# EAGLE board BARELYBONEARDUINO (EAGLE 7.2.0)
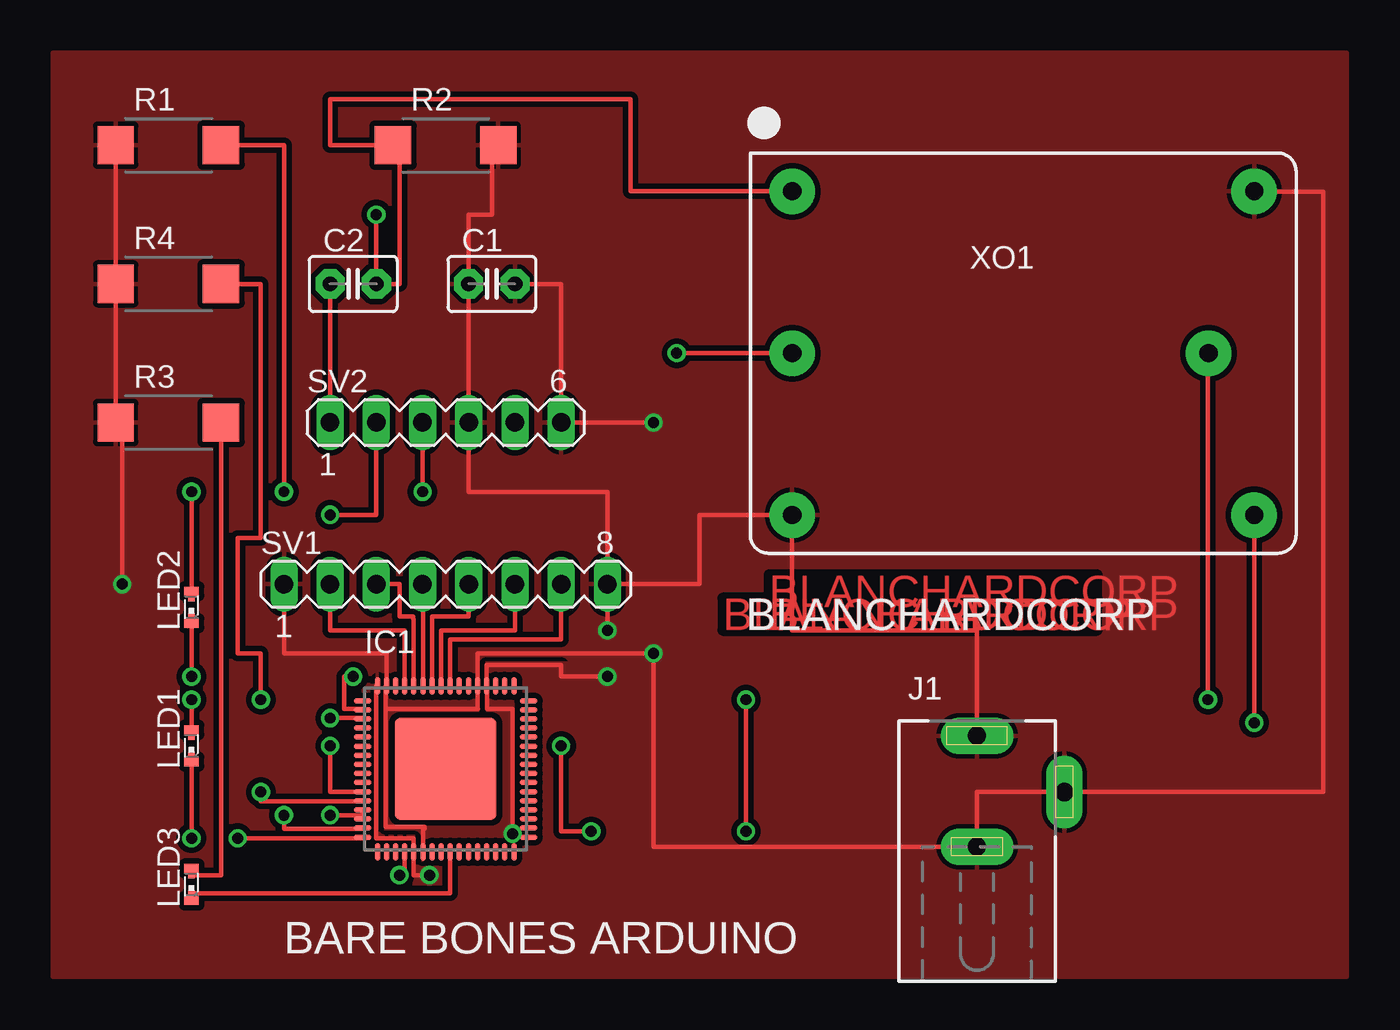
[diagram p0: board, top side]
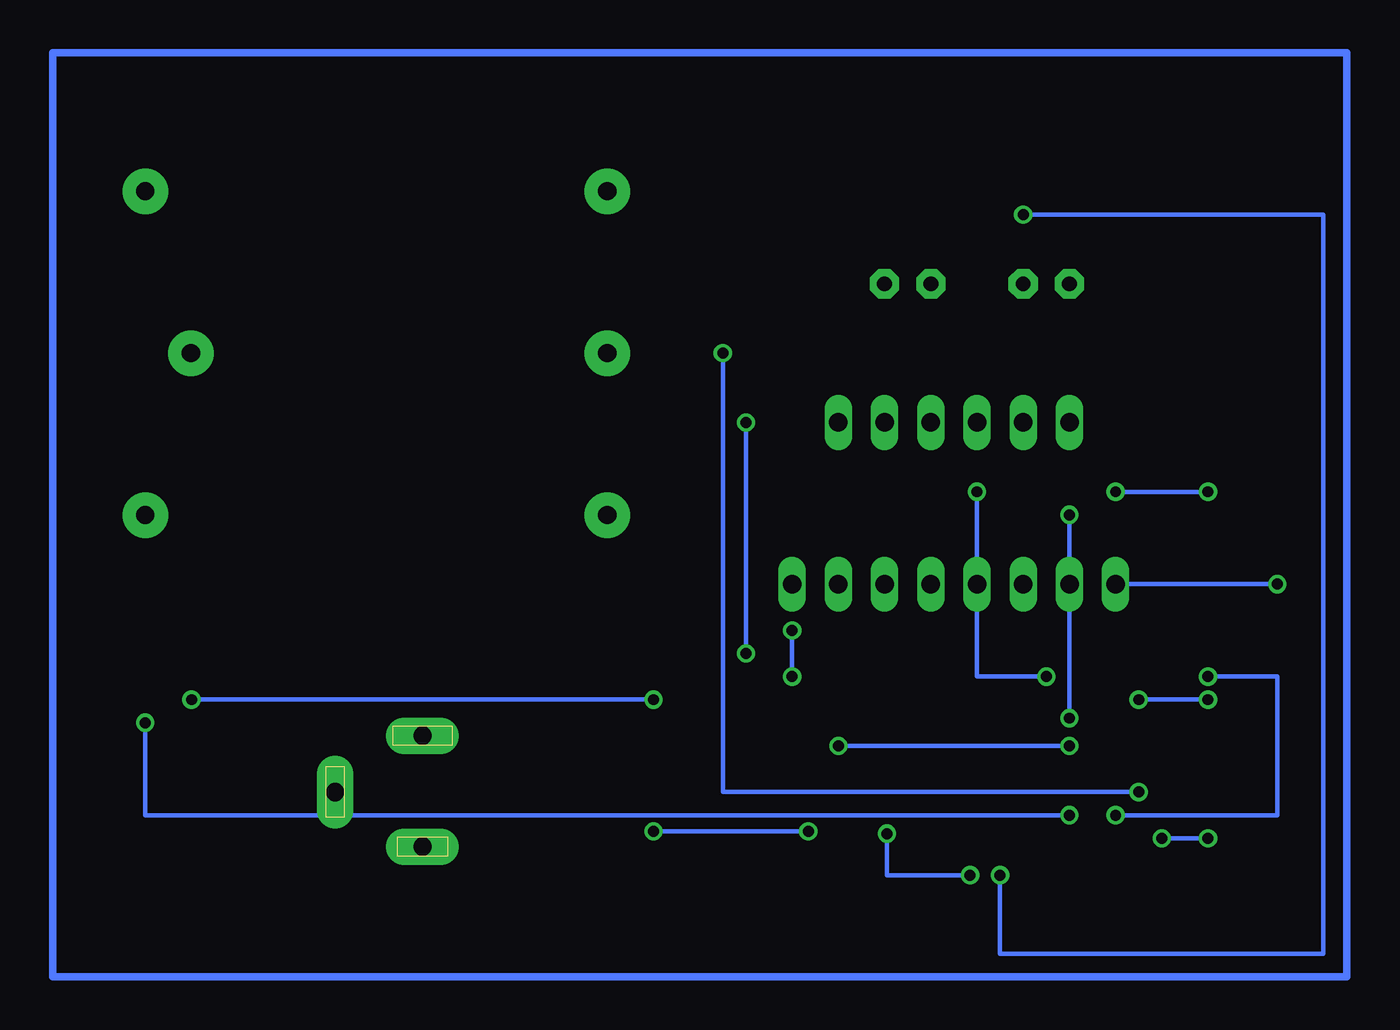
[diagram p1: board, bottom side, seen from below]

No outline drawn. Coordinates in mm, seen from the top.
Copper layers (1*16): Top 0.035mm / dielectric 1.5mm / Bottom 0.035mm
Design rules "default": minimum track width 10mil, minimum drill 24mil, track to track 8mil, track to pad 8mil, pad to pad 8mil, via to via 8mil, smd to smd 8mil, copper to edge 40mil, drill to drill 8mil, minimum pad ring 10mil, minimum via ring 8mil, stop-mask expansion 4mil, vias tented up to drill 0mil, thermal gap 10mil

## Footprints (pad centres in the part's own frame; a part is rotated, then mirrored left to right if it is on the bottom)
C2.5-3 = drill 0.813 pad 1.6 octagon: 1 -1.27,0; 2 1.27,0
64M1 = smd 0.95 x 0.3: 1 -4.56,3.75; 2 -4.56,3.25; 3 -4.56,2.75; 4 -4.56,2.25; 5 -4.56,1.75; 6 -4.56,1.25; 7 -4.56,0.75; 8 -4.56,0.25; 9 -4.56,-0.25; 10 -4.56,-0.75; 11 -4.56,-1.25; 12 -4.56,-1.75; 13 -4.56,-2.25; 14 -4.56,-2.75; 15 -4.56,-3.25; 16 -4.56,-3.75; 33 4.56,-3.75; 34 4.56,-3.25; 35 4.56,-2.75; 36 4.56,-2.25; 37 4.56,-1.75; 38 4.56,-1.25; 39 4.56,-0.75; 40 4.56,-0.25; 41 4.56,0.25; 42 4.56,0.75; 43 4.56,1.25; 44 4.56,1.75; 45 4.56,2.25; 46 4.56,2.75; 47 4.56,3.25; 48 4.56,3.75 | smd 0.3 x 0.95: 17 -3.75,-4.56; 18 -3.25,-4.56; 19 -2.75,-4.56; 20 -2.25,-4.56; 21 -1.75,-4.56; 22 -1.25,-4.56; 23 -0.75,-4.56; 24 -0.25,-4.56; 25 0.25,-4.56; 26 0.75,-4.56; 27 1.25,-4.56; 28 1.75,-4.56; 29 2.25,-4.56; 30 2.75,-4.56; 31 3.25,-4.56; 32 3.75,-4.56; 49 3.75,4.56; 50 3.25,4.56; 51 2.75,4.56; 52 2.25,4.56; 53 1.75,4.56; 54 1.25,4.56; 55 0.75,4.56; 56 0.25,4.56; 57 -0.25,4.56; 58 -0.75,4.56; 59 -1.25,4.56; 60 -1.75,4.56; 61 -2.25,4.56; 62 -2.75,4.56; 63 -3.25,4.56; 64 -3.75,4.56 | smd 5.6 x 5.6: EXP 0,0
DCJ0202 = drill 1 pad 2 long: 1 0,3.1; 2 4.8,0; 3 0,-3
SMARTLED-TTW = smd 0.8 x 0.5: A 0,-0.875; C 0,0.875 | smd 0.35 x 0.35: A@1 0,-0.5; C@1 0,0.5
R2512W = smd 2 x 2.1: 1 -2.896,0; 2 2.896,0
MA08-1 = drill 1.016 long: 1 -8.89,0; 2 -6.35,0; 3 -3.81,0; 4 -1.27,0; 5 1.27,0; 6 3.81,0; 7 6.35,0; 8 8.89,0
MA06-1 = drill 1.016 long: 1 -6.35,0; 2 -3.81,0; 3 -1.27,0; 4 1.27,0; 5 3.81,0; 6 6.35,0
CO-08-5 = drill 1 pad 2.5: 1 -12.7,8.9; 2 -12.7,0; 3 -12.7,-8.9; 4 12.7,-8.9; 5 12.7,8.9; 6 10.19,0

## Placement (x,y rotation side)
C1  [C2.5-3]  24.13,38.1 0 top
C2  [C2.5-3]  16.51,38.1 0 top
IC1  ATMEGA325P  [64M1]  21.59,11.43 0 top
J1  DCJ0202  [DCJ0202]  50.8,10.16 0 top
LED1  [SMARTLED-TTW]  7.62,12.7 0 top
LED2  [SMARTLED-TTW]  7.62,20.32 0 top
LED3  [SMARTLED-TTW]  7.62,5.08 0 top
R1  [R2512W]  6.35,45.72 0 top
R2  [R2512W]  21.59,45.72 0 top
R3  [R2512W]  6.35,30.48 0 top
R4  [R2512W]  6.35,38.1 0 top
SV1  [MA08-1]  21.59,21.59 0 top
SV2  [MA06-1]  21.59,30.48 0 top
XO1  OCXO-6-PIN-IQOV-70-8  [CO-08-5]  53.34,34.29 0 top

## Library data of the parts
C1 C2 = capacitor-wima
IC1 = atmel; MPN: ATMEGA325PV-10AU; OC_FARNELL: 1636939; OC_NEWARK: 03P2025
J1 = con-jack; OC_FARNELL: unknown; OC_NEWARK: unknown
LED1-LED3 = led
R1-R4 = resistor
SV1 SV2 = con-lstb; OC_FARNELL: unknown; OC_NEWARK: unknown
XO1 = IQD-Frequency-Products

## Nets
CTS: SV2.5
DTR: C2.1 SV2.1
GND: C1.2 IC1.22 IC1.53 IC1.63 J1.2 J1.3 R1.1 R3.1 R4.1 SV1.1 SV2.6 XO1.5
MISO: IC1.13 XO1.4
MOSI: IC1.12 XO1.2
N$3: IC1.58 SV1.5
N$4: IC1.59 SV1.4
N$5: IC1.60 SV1.3
N$6: IC1.61 SV1.2
N$9: IC1.15 LED2.A@1
N$10: LED2.C@1 R1.2
N$11: LED1.C@1 R4.2
N$12: LED3.C@1 R3.2
N$13: IC1.25 LED3.A@1
N$14: IC1.16 LED1.A@1
N$16: IC1.57 SV1.6
N$18: IC1.56 SV1.7
RESET: C2.2 IC1.20 R2.1 XO1.1
RX: IC1.2 SV2.3
SCK: IC1.11 XO1.6
TX: IC1.3 SV2.2
VCC: C1.1 IC1.21 IC1.52 IC1.64 J1.1 R2.2 SV1.8 SV2.4 XO1.3

## Tracks (layer width: path | path; a pad name or v marks a point on that pad's centre or on a via)
DTR
  Top 0.254: C2.1 SV2.1
GND  (via drill 0.6)
  Top 0.254: C1.2 27.94,38.1 SV2.6 v33.02,30.48 | XO1.5 69.85,43.18 69.85,10.16 J1.2 50.8,10.16 J1.3 33.02,7.16 v33.02,17.78 23.34,17.78 IC1.53 23.34,14.73 | R1.1 R4.1 R3.1 3.81,30.48 v3.81,21.59 | SV1.1 12.7,17.78 18.34,17.78 IC1.63 18.29,15.99 18.29,14.73 | 18.29,14.73 18.29,8.26 20.45,8.26 20.45,8.13 20.34,8.13 IC1.22 | 18.29,14.73 23.34,14.73 | 23.37,14.73 23.34,14.73
  Bottom 0.254: v3.81,21.59 SV1.1 | v33.02,30.48 v33.02,17.78
  pour Top (isolate 0.305): 0,0 0,50.8 71.12,50.8 71.12,0
MISO  (via drill 0.6)
  Top 0.254: XO1.4 v66.04,13.97 | v15.24,8.89 17.03,8.89 IC1.13
  Bottom 0.254: v66.04,13.97 66.04,8.89 v15.24,8.89
MOSI  (via drill 0.6)
  Top 0.254: XO1.2 v34.29,34.29 | v11.43,10.16 11.43,9.65 17.03,9.65 IC1.12
  Bottom 0.254: v34.29,34.29 34.29,10.16 v11.43,10.16
N$1
  Bottom 0.406: 0,0 0,50.8 71.12,50.8 71.12,0 0,0
N$3
  Top 0.254: SV1.5 22.86,19.81 20.84,19.81 IC1.58
N$4
  Top 0.254: SV1.4 20.34,21.59 IC1.59
N$5
  Top 0.254: SV1.3 19.05,21.59 19.05,19.81 19.81,19.81 19.81,19.68 19.84,19.68 IC1.60
N$6
  Top 0.254: SV1.2 15.24,19.05 19.34,19.05 IC1.61
N$9  (via drill 0.6)
  Top 0.254: LED2.A@1 v7.62,16.51 | v12.7,8.89 12.7,8.13 17.03,8.13 IC1.15
  Bottom 0.254: v7.62,16.51 3.81,16.51 3.81,8.89 v12.7,8.89
N$10  (via drill 0.6)
  Top 0.254: R1.2 12.7,45.72 v12.7,26.67 | v7.62,26.67 LED2.C@1
  Bottom 0.254: v12.7,26.67 v7.62,26.67
N$11  (via drill 0.6)
  Top 0.254: R4.2 11.43,38.1 11.43,24.13 10.16,24.13 10.16,17.78 11.43,17.78 v11.43,15.24 | v7.62,15.24 LED1.C@1
  Bottom 0.254: v11.43,15.24 v7.62,15.24
N$12
  Top 0.254: LED3.C@1 9.25,5.58 R3.2
N$13
  Top 0.254: LED3.A@1 21.84,4.58 IC1.25
N$14  (via drill 0.6)
  Top 0.254: LED1.A@1 v7.62,7.62 | v10.16,7.62 17.03,7.62 IC1.16
  Bottom 0.254: v7.62,7.62 v10.16,7.62
N$16
  Top 0.254: SV1.6 25.4,19.05 21.34,19.05 IC1.57
N$18
  Top 0.254: SV1.7 27.94,18.54 21.84,18.54 IC1.56
RESET  (via drill 0.6)
  Top 0.254: XO1.1 31.75,43.19 31.75,48.26 15.24,48.26 15.24,45.72 R2.1 19.05,45.72 19.05,38.1 C2.2 v17.78,41.91 | v19.05,5.59 19.34,5.59 IC1.20
  Bottom 0.254: v17.78,41.91 1.27,41.91 1.27,1.27 19.05,1.27 v19.05,5.59
RX  (via drill 0.6)
  Top 0.254: SV2.3 v20.32,26.67 | v16.51,16.51 16,16.51 16,14.73 17.03,14.73 IC1.2
  Bottom 0.254: v20.32,26.67 20.32,16.51 v16.51,16.51
SCK  (via drill 0.6)
  Top 0.254: XO1.6 63.5,34.29 v63.5,15.24 | v38.1,15.24 v38.1,8 | v29.59,8 27.94,8 v27.94,12.7 | v15.24,12.7 15.24,10.16 17.03,10.16 IC1.11
  Bottom 0.254: v63.5,15.24 v38.1,15.24 | v38.1,8 v29.59,8 | v27.94,12.7 v15.24,12.7
TX  (via drill 0.6)
  Top 0.254: SV2.2 17.78,25.4 v15.24,25.4 | v15.24,14.22 17.03,14.22 IC1.3
  Bottom 0.254: v15.24,25.4 v15.24,14.22
VCC  (via drill 0.6)
  Top 0.254: R2.2 24.13,45.72 24.13,41.91 22.86,41.91 C1.1 SV2.4 22.86,26.67 30.48,26.67 SV1.8 | SV1.8 35.56,21.59 35.56,25.4 XO1.3 40.64,19.05 50.8,19.05 J1.1 | SV1.8 v30.48,19.05 | v30.48,16.51 27.94,16.51 27.94,17.14 23.84,17.14 IC1.52 23.88,15.99 23.88,14.73 25.27,14.73 v25.27,7.87 | IC1.64 17.78,15.99 17.78,7.62 19.84,7.62 IC1.21 19.84,5.59 v20.7,5.59
  Bottom 0.254: v30.48,19.05 v30.48,16.51 | v25.27,7.87 25.27,5.59 v20.7,5.59
  pour Top (isolate 0.305): 0,0 0,50.8 71.12,50.8 71.12,0

## Text on the board
Top: BLANCHARDCORP | BLANCHARDCORP | BLANCHARDCORP | BLANCHARDCORP | BLANCHARDCORP
tPlace: BLANCHARDCORP | BARE BONES ARDUINO